# Altium PCB 3 Channel Buck Converter PCB.PcbDoc (part 1 of 2)
Units mm, origin at the board's own origin, x right, y up, seen from the top; angles counter-clockwise.
Board outline 60 x 50 mm, 2 copper layers (Top Layer, Bottom Layer); 65 components, 39 nets, 165 pads, 74 vias.
Unrouted connection lines stored in the file: 123.
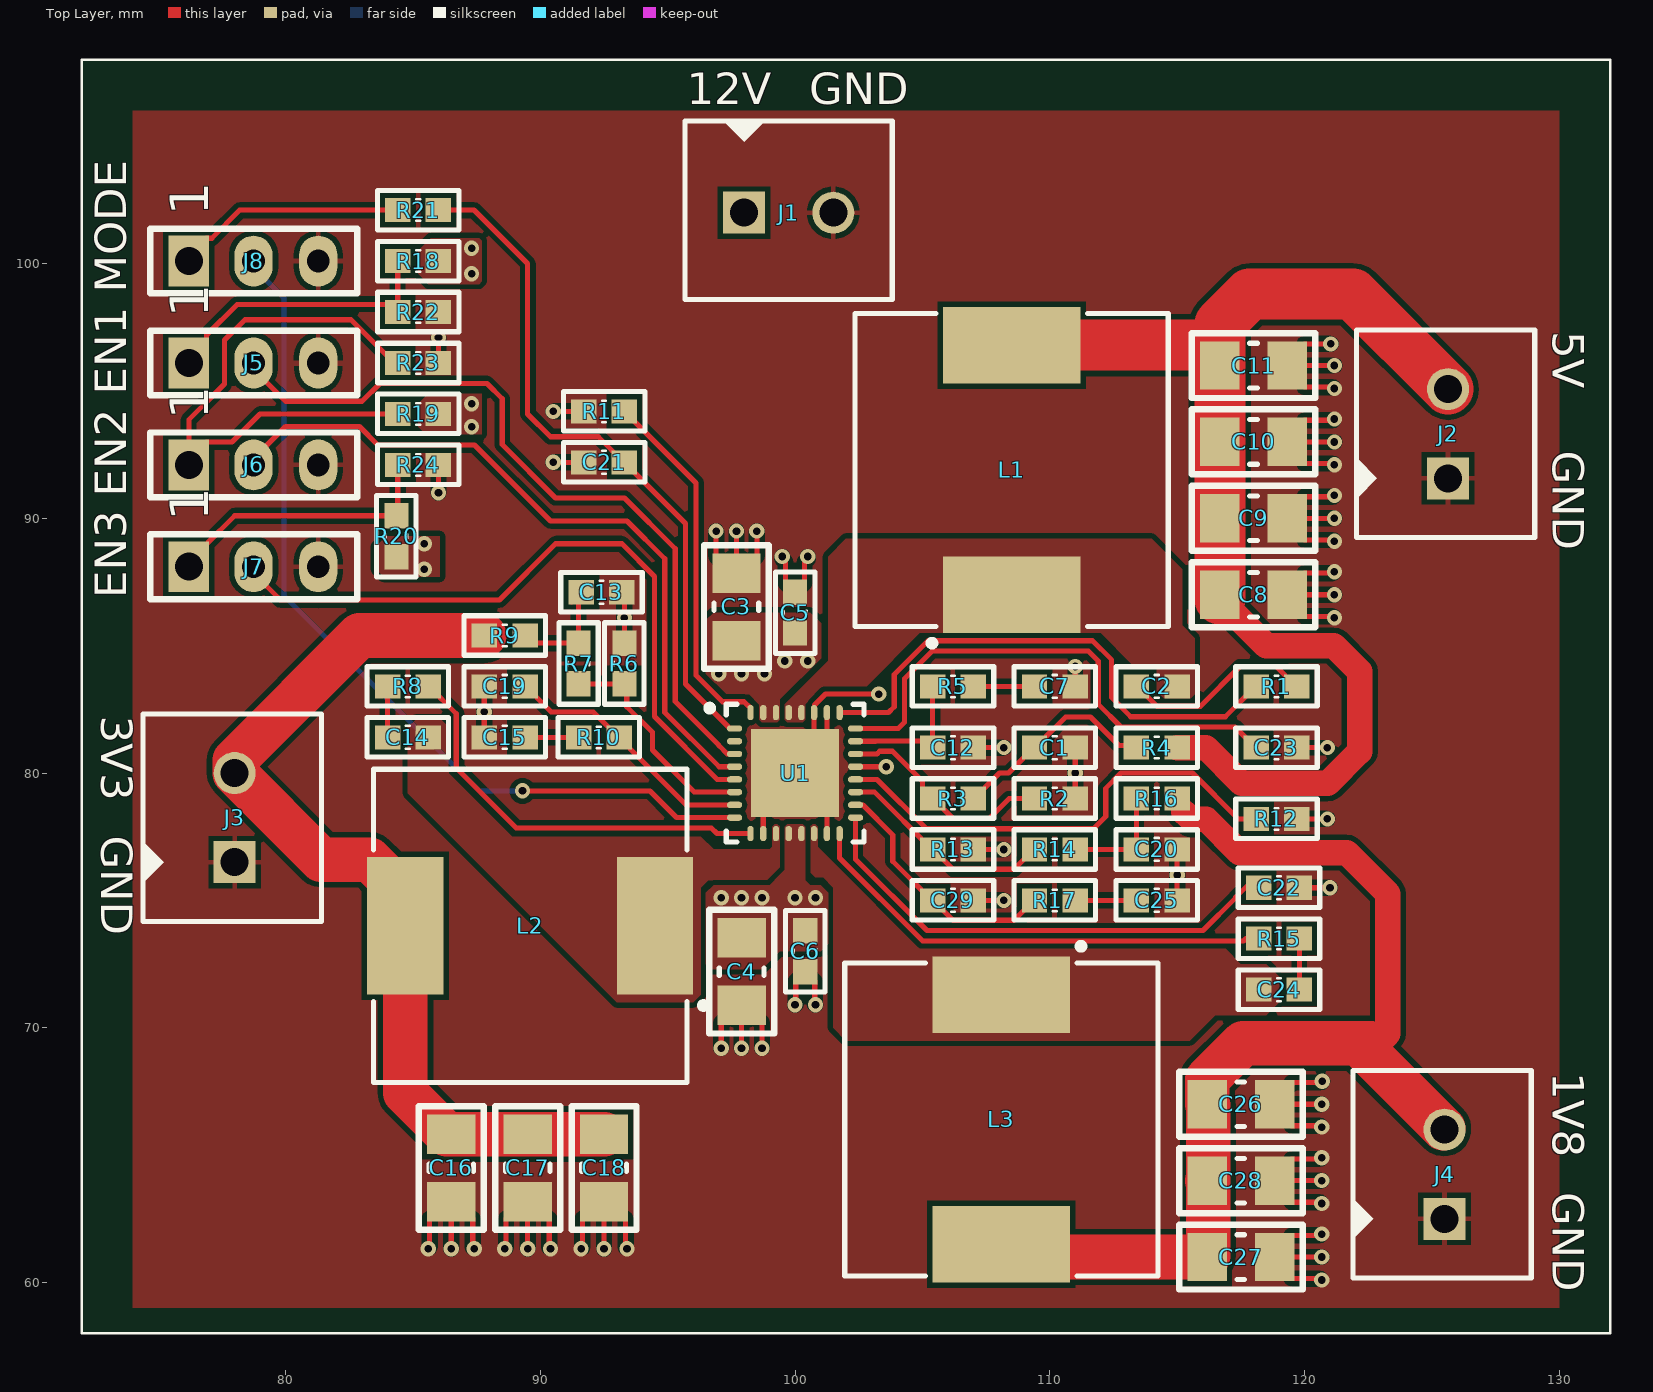
[diagram p0: Top Layer view]
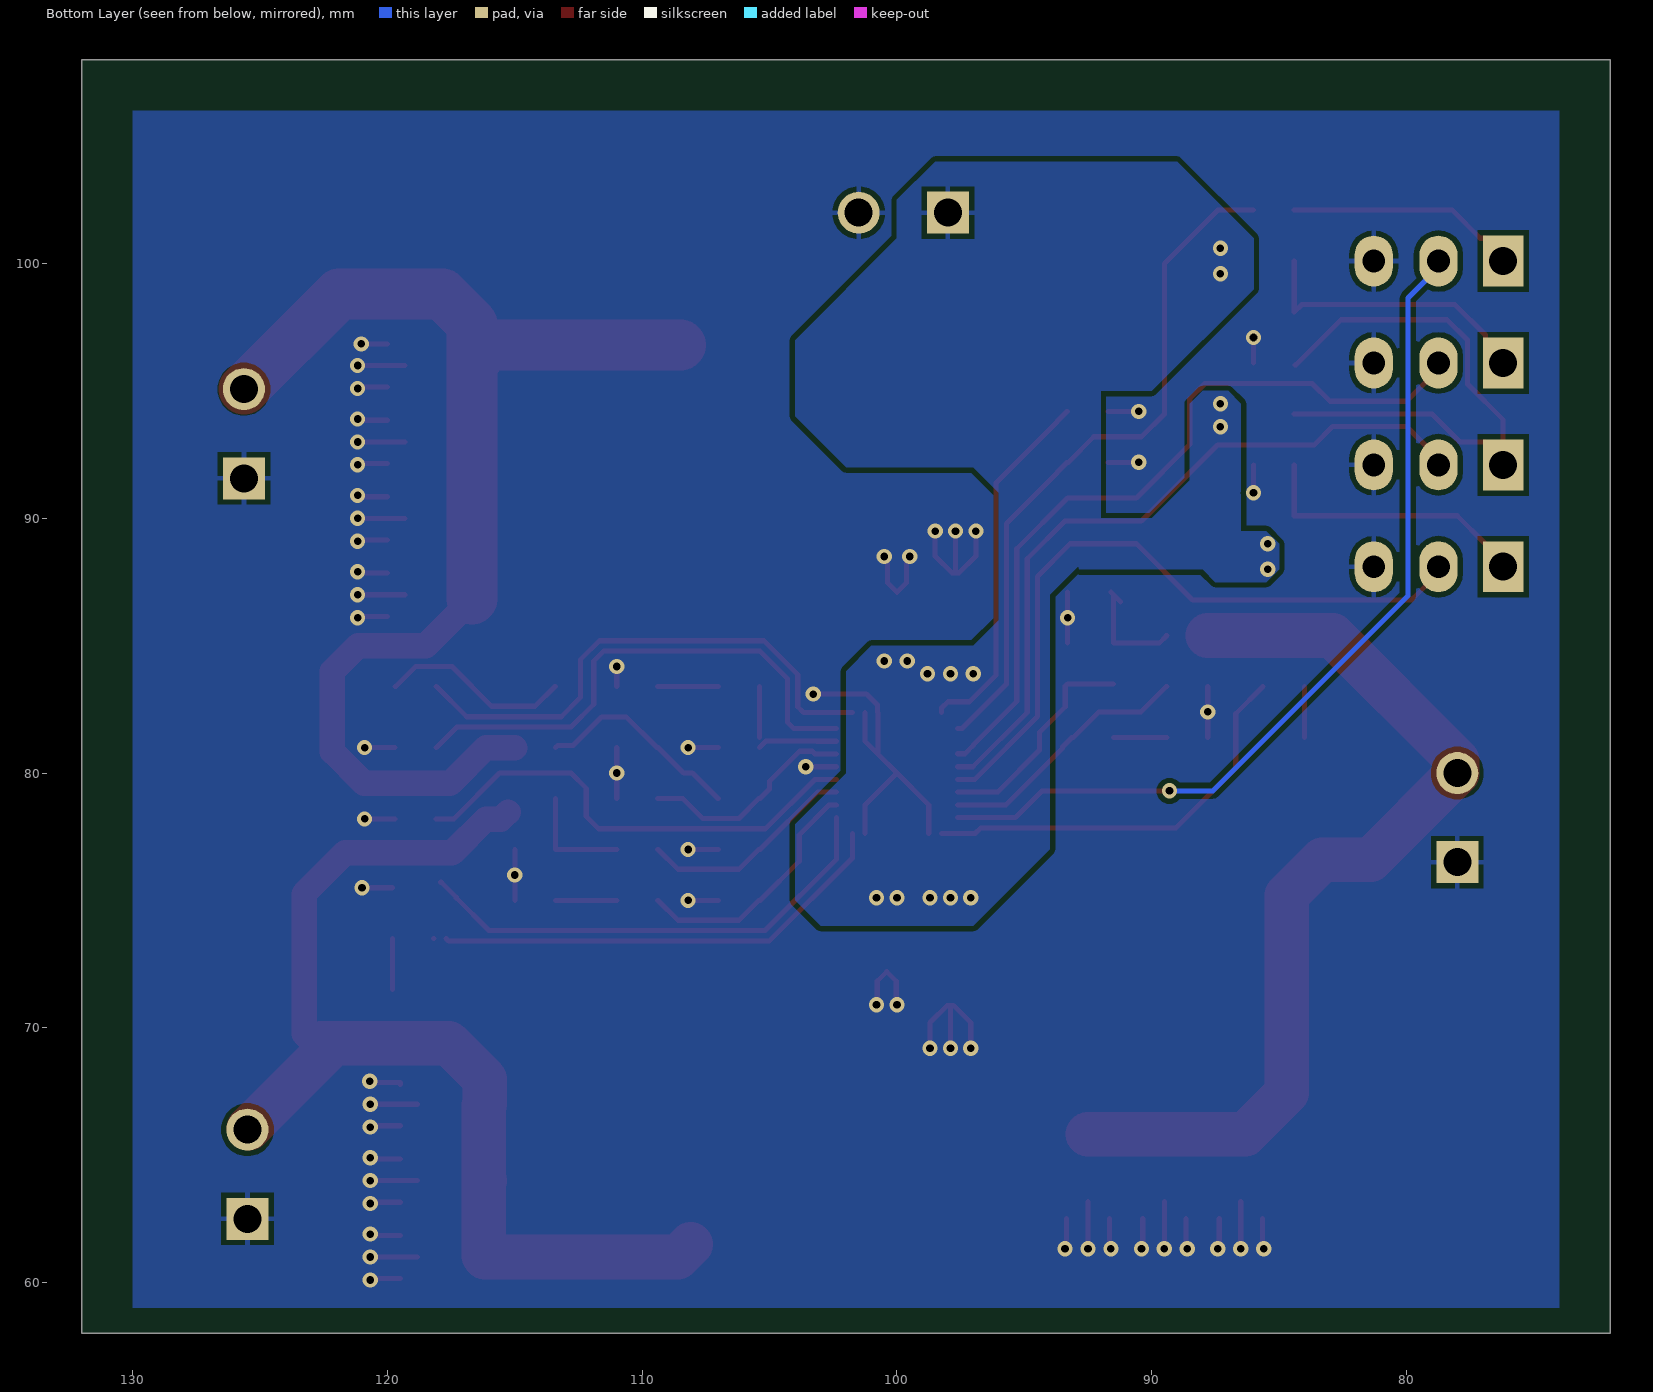
[diagram p1: Bottom Layer view, seen from below]
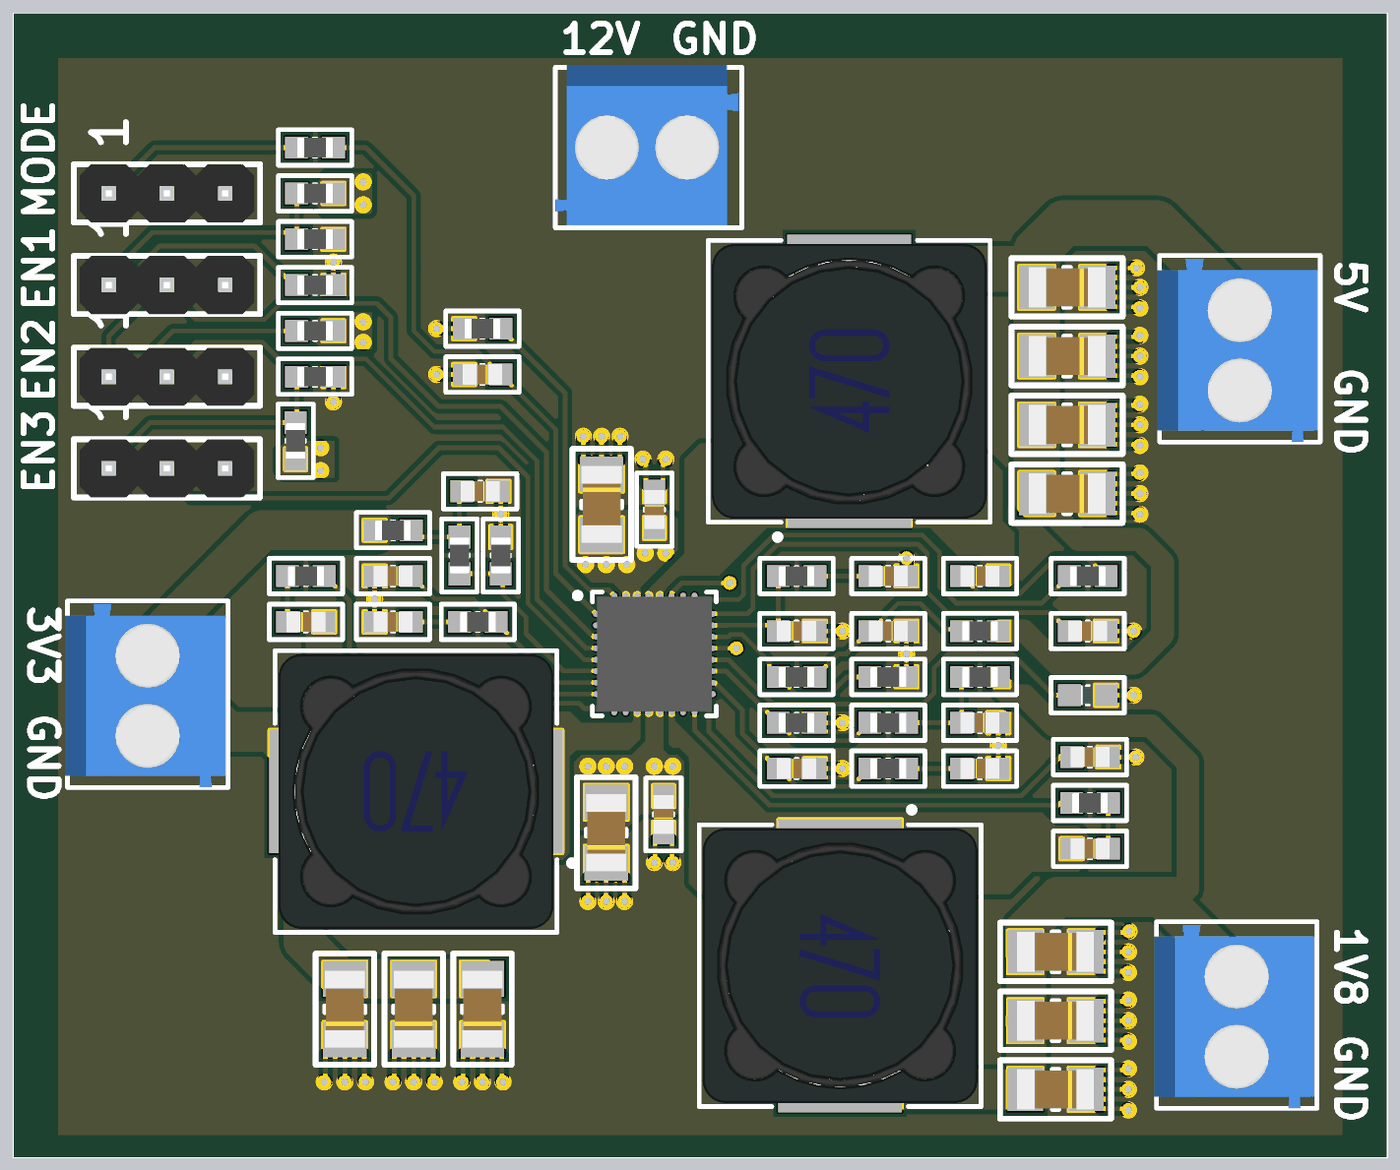
[diagram p2: 3D render of the assembled board from above, using the file's embedded part models]

## Layer stack, top to bottom
Top Solder: solder mask 0.0102, Solder Resist, Dk 3.5
Top Layer: signal copper 0.0356
Dielectric 1: dielectric 0.32, FR-4, Dk 4.8
Bottom Layer: signal copper 0.0356
Bottom Solder: solder mask 0.0102, Solder Resist, Dk 3.5

## Board outline
72,58 72,108 132,108 132,58

## Design rules (kind name [scope] priority, off if disabled: settings)
BoardOutlineClearance [All] p1: gap=0.2 ignorepadtopadclearanceinfootprint=FALSE
Clearance [All] p1: gap=0.203 ignorepadtopadclearanceinfootprint=FALSE except(0.25: Arc-Hole Track-Hole SMDPad-Hole THPad-Hole Via-Hole Fill-Hole Poly-Hole Region-Hole Text-Hole)
ComponentClearance [All] p1: gap=0.127 collisioncheckmode=3 verticalgap=0.127 showdistances=TRUE
DiffPairsRouting [All] p1: maxlimit=0.381 minlimit=0.203 mostfreqgap=0.203 toplayer_minwidth=0.203 toplayer_maxwidth=25.4 toplayer_prefwidth=0.203 bottomlayer_minwidth=0.203 bottomlayer_maxwidth=25.4 bottomlayer_prefwidth=0.203 maxuncoupledlength=12.7
Height [All] p1: minheight=0 maxheight=1816.048 prefheight=12.7
HoleSize [All] p1: absolutevalues=TRUE maxlimit=6.3 minlimit=0.3 maxpercent=80.000 minpercent=20.000
HoleToHoleClearance [All] p1: gap=0.25 allowstackedmicrovias=FALSE
MinimumAnnularRing [All] p1: minimumring=0.076
MinimumSolderMaskSliver [All] p1: minsoldermaskwidth=0
PlaneClearance [All] p1: clearance=0.203
PlaneConnect PlaneConnectPowerPads [InPadClass('PowerPads')] p1: planeconnectstyle=Direct reliefexpansion=0.508 reliefentries=4 reliefconductorwidth=0.254 reliefairgap=0.254
PlaneConnect [All] p2: planeconnectstyle=Direct reliefexpansion=0.3 reliefentries=4 reliefconductorwidth=0.203 reliefairgap=0.203
PolygonConnect PolygonConnectPowerPads [All vs (InPadClass('PowerPads'))] p1: connectstyle=Direct reliefconductorwidth=0.254 reliefentries=4 polygonreliefangle="90 Angle" airgapwidth=0.254
PolygonConnect [All] p2: thpad.connectstyle=Relief thpad.reliefconductorwidth=0.203 thpad.reliefentries=4 thpad.polygonreliefangle="90 Angle" thpad.airgapwidth=0.203 smdpad.connectstyle=Direct smdpad.reliefconductorwidth=0.203 smdpad.reliefentries=4 smdpad.polygonreliefangle="90 Angle" smdpad.airgapwidth=0.203 via.connectstyle=Direct via.reliefconductorwidth=0.127 via.reliefentries=4 via.polygonreliefangle="90 Angle" via.airgapwidth=0.127
RoutingVias [All] p1: holewidth=0.3 width=0.6 viastyle="Through Hole" minholewidth=0.3 minwidth=0.6 maxholewidth=0.6 maxwidth=6.6
SilkToSilkClearance [All] p1: silktosilkclearance=0
SilkToSolderMaskClearance [IsPad] p1: minsilkscreentomaskgap=0.127 clearancetoexposedcopper=TRUE
SolderMaskExpansion [All] p1: expansion=0.075 istentingtop=FALSE
Width [All] p1: maxlimit=25.4 minlimit=0.203 preferedwidth=0.203 minimp=50.000000 maximp=50.000000 favimp=50.000000
20 further rules are at their usual default settings.

## Components (designator, comment, footprint, x,y, rotation, side; value= is the part's Value field where it differs from the comment)
C1 "CAP_150pF_%1_0603_50V_NP0_CER" 0603_CAP 110.2,81 r180 top
C2 "CAP_0.47uF_%10_0603_25V_X7R_CER" 0603_CAP 114.2,83.4 r0 top
C3 "CAP_22uF_%10_1206_25V_X5R_CER" 1206_CAP 97.7,86.525 r270 top
C4 "CAP_22uF_%10_1206_25V_X5R_CER" 1206_CAP 97.9,72.2 r90 top
C5 "CAP_1uF_%10_0603_25V_X7R_CER" 0603_CAP 100,86.3 r270 top
C6 "CAP_1uF_%10_0603_25V_X7R_CER" 0603_CAP 100.4,73 r90 top
C7 "CAP_3300pF_0603_50V_X7R_CER" 0603_CAP 110.2,83.4 r0 top
C8 "CAP_22uF_%10_1206_25V_X5R_CER" 1206_CAP 118,87 r180 top
C9 "CAP_22uF_%10_1206_25V_X5R_CER" 1206_CAP 118,90 r180 top
C10 "CAP_22uF_%10_1206_25V_X5R_CER" 1206_CAP 118,93 r180 top
C11 "CAP_22uF_%10_1206_25V_X5R_CER" 1206_CAP 118,96 r180 top
C12 "CAP_3.3pF_±0.1pF_0603_50V_NP0_CER" 0603_CAP 106.2,81 r0 top
C13 "CAP_150pF_%1_0603_50V_NP0_CER" 0603_CAP 92.4,87.1 r180 top
C14 "CAP_0.47uF_%10_0603_25V_X7R_CER" 0603_CAP 84.8,81.4 r0 top
C15 "CAP_9100pF_%5_0603_50V_U2J_CER" 0603_CAP 88.6,81.4 r180 top
C16 "CAP_22uF_%10_1206_25V_X5R_CER" 1206_CAP 86.5,64.5 r90 top
C17 "CAP_22uF_%10_1206_25V_X5R_CER" 1206_CAP 89.5,64.5 r90 top
C18 "CAP_22uF_%10_1206_25V_X5R_CER" 1206_CAP 92.5,64.5 r90 top
C19 "CAP_6.8pF_±0.5p_0603_50V_C0G/NP0_CER" 0603_CAP 88.6,83.4 r180 top
C20 "CAP_150pF_%1_0603_50V_NP0_CER" 0603_CAP 114.2,77 r180 top
C21 "CAP_1uF_%10_0603_25V_X7R_CER" 0603_CAP 92.502,92.198 r180 top
C22 "CAP_10nF_%20_0603_50V_X7R_CER" 0603_CAP 119,75.5 r180 top
C23 "CAP_10nF_%20_0603_50V_X7R_CER" 0603_CAP 118.9,81 r180 top
C24 "CAP_0.47uF_%10_0603_25V_X7R_CER" 0603_CAP 119,71.5 r180 top
C25 "CAP_9100pF_%5_0603_50V_U2J_CER" 0603_CAP 114.2,75 r0 top
C26 "CAP_22uF_%10_1206_25V_X5R_CER" 1206_CAP 117.5,67 r180 top
C27 "CAP_22uF_%10_1206_25V_X5R_CER" 1206_CAP 117.5,61 r180 top
C28 "CAP_22uF_%10_1206_25V_X5R_CER" 1206_CAP 117.5,64 r180 top
C29 "CAP_6.8pF_±0.5p_0603_50V_C0G/NP0_CER" 0603_CAP 106.2,75 r0 top
J1 "CON_1X2_Terminal Block" "1x2_TERMINAL BLOCK" 98,102 r0 top
J2 "CON_1X2_Terminal Block" "1x2_TERMINAL BLOCK" 125.638,91.574 r90 top
J3 "CON_1X2_Terminal Block" "1x2_TERMINAL BLOCK" 78,76.5 r90 top
J4 "CON_1X2_Terminal Block" "1x2_TERMINAL BLOCK" 125.5,62.5 r90 top
J5 "CON_1X3_2.54mm_Male Header" DIP_1X3_HEADER_2.54_PITCH 76.2,96.1 r0 top
J6 "CON_1X3_2.54mm_Male Header" DIP_1X3_HEADER_2.54_PITCH 76.2,92.1 r0 top
J7 "CON_1X3_2.54mm_Male Header" DIP_1X3_HEADER_2.54_PITCH 76.2,88.1 r0 top
J8 "CON_1X3_2.54mm_Male Header" DIP_1X3_HEADER_2.54_PITCH 76.2,100.1 r0 top
L1 "IND_10uH_5A_26.5 mOHM_SMD" INDP120120X100N 108.5,91.9 r90 top
L2 "IND_22uH_3.2A_40 mOHM_SMD" INDP120120X100N 89.6,74 r180 top
L3 "IND_15uH_4.6A_36 mOHM_SMD" INDP120120X100N 108.1,66.4 r270 top
R1 "RES_0 OHM_JUMPER_0603_1/10W" 0603_RES 118.9,83.4 r180 top
R2 "RES_4.99K OHM_1%_0603_1/10W" 0603_RES 110.2,79 r180 top
R3 "RES_36.5K OHM_1%_0603_1/10W" 0603_RES 106.2,79 r0 top
R4 "RES_0 OHM_JUMPER_0603_1/10W" 0603_RES 114.2,81 r0 top
R5 "RES_24.9K OHM_1%_0603_1/10W" 0603_RES 106.2,83.4 r0 top
R6 "RES_4.99K OHM_1%_0603_1/10W" 0603_RES 93.3,84.3 r270 top
R7 "RES_22.6K OHM_1%_0603_1/10W" 0603_RES 91.5,84.3 r90 top
R8 "RES_0 OHM_JUMPER_0603_1/10W" 0603_RES 84.8,83.4 r0 top
R9 "RES_0 OHM_JUMPER_0603_1/10W" 0603_RES 88.6,85.4 r180 top
R10 "RES_15.4K OHM_1%_0603_1/10W" 0603_RES 92.3,81.4 r180 top
R11 "RES_0 OHM_JUMPER_0603_1/10W" 0603_RES 92.502,94.198 r0 top
R12 "RES_84.5K OHM_1%_0603_1/10W" 0603_RES 118.9,78.2 r180 top
R13 "RES_10K OHM_1%_0603_1/10W" 0603_RES 106.2,77 r180 top
R14 "RES_20K OHM _1%_0603_1/10W" 0603_RES 110.2,77 r0 top
R15 "RES_0 OHM_JUMPER_0603_1/10W" 0603_RES 119,73.5 r180 top
R16 "RES_0 OHM_JUMPER_0603_1/10W" 0603_RES 114.2,79 r0 top
R17 "RES_15.4K OHM_1%_0603_1/10W" 0603_RES 110.2,75 r0 top
R18 "RES_100K OHM_5%_0603_1/10W" 0603_RES 85.2,100.1 r0 top
R19 "RES_100K OHM_5%_0603_1/10W" 0603_RES 85.2,94.1 r0 top
R20 "RES_100K OHM_5%_0603_1/10W" 0603_RES 84.35,89.3 r270 top
R21 "RES_0 OHM_JUMPER_0603_1/10W" 0603_RES 85.2,102.1 r0 top
R22 "RES_33K OHM_5%_0603_1/10W" 0603_RES 85.2,98.1 r180 top
R23 "RES_33K OHM_5%_0603_1/10W" 0603_RES 85.2,96.1 r180 top
R24 "RES_33K OHM_5%_0603_1/10W" 0603_RES 85.2,92.1 r180 top
U1 "PMIC_TPS65265" QFN50P500X500X100_HS-33N 100,80 r0 top

## Footprints (in the part's own frame and the unit in brackets; to place one, negate y for a bottom-side part, rotate by r counter-clockwise, add the part's x,y. Pads: shape width x height; smd on the part's side, far side on the other; paste and mask are expansions set on the pad)
"1x2_TERMINAL BLOCK" [mm]
  rect 1.65x1.65 hole 1.1: 1(0,0)
  round 1.65 hole 1.1: 2(3.5,0)
  silkscreen extent -2.32,-3.4 5.82,3.6, body extent -2.32,-3.3 5.68,3.7, height 8.41
0603_CAP [mm]
  rect 1x0.95 smd: 1(-0.8,0) 2(0.8,0)
  silkscreen extent -1.6,-0.77 1.6,0.77, body extent -0.85,-0.44 0.85,0.44, height 0.89
0603_RES [mm]
  rect 1x0.95 smd: 1(-0.8,0) 2(0.8,0)
  silkscreen extent -1.6,-0.77 1.6,0.77, body extent -0.77,-0.43 0.77,0.43, height 0.49
1206_CAP [mm]
  rect 1.55x1.9 smd: 1(-1.325,0) 2(1.325,0)
  silkscreen extent -2.42,-1.28 2.42,1.28, body extent -1.68,-0.88 1.68,0.88, height 1.24
DIP_1X3_HEADER_2.54_PITCH [mm]
  rect 1.6x2 hole 1.1: 1(0,0)
  oval 1.5x2 hole 0.9: 2(2.54,0) 3(5.08,0)
  silkscreen extent -1.52,-1.27 6.6,1.27, body extent -1.27,-1.27 6.35,1.27, height 8.38
INDP120120X100N [mm] "Precision Wire Wound Inductor, 2-Leads, Body 12,00x12,00mm, IPC Medium Density"
  rect 3x5.4 smd: 1(-4.9,0) 2(4.9,0)
  silkscreen extent -6.92,-6.15 6.15,6.15, body extent -6,-6 6,6, height 7.42
QFN50P500X500X100_HS-33N [mm] "QFN, 32-Leads, Body 5,00x5,00mm, Pitch 0,50mm, Thermal Pad 3,45x3,45mm, IPC Medium Density"
  oval 0.6x0.25 smd: 1(-2.375,1.75) 2(-2.375,1.25) 3(-2.375,0.75) 4(-2.375,0.25) 5(-2.375,-0.25) 6(-2.375,-0.75) 7(-2.375,-1.25) 8(-2.375,-1.75) 17(2.375,-1.75) 18(2.375,-1.25) 19(2.375,-0.75) 20(2.375,-0.25) 21(2.375,0.25) 22(2.375,0.75) 23(2.375,1.25) 24(2.375,1.75)
  oval 0.25x0.6 smd: 9(-1.75,-2.375) 10(-1.25,-2.375) 11(-0.75,-2.375) 12(-0.25,-2.375) 13(0.25,-2.375) 14(0.75,-2.375) 15(1.25,-2.375) 16(1.75,-2.375) 25(1.75,2.375) 26(1.25,2.375) 27(0.75,2.375) 28(0.25,2.375) 29(-0.25,2.375) 30(-0.75,2.375) 31(-1.25,2.375) 32(-1.75,2.375)
  rect 3.45x3.45 smd: 33(0,0)
  silkscreen extent -3.47,-2.7 2.7,2.7, body extent -2.5,-2.5 2.5,2.5, height 1

## Part data
C1 C13 C20: "0603 150 pF 50 V ±1 % Tolerance C0G/NP0 SMT Multilayer Ceramic Capacitor", Capacitance=150pF, Case Code (Metric)=1608, Case Code (Imperial)=0603, Dielectric=C0G, Manufacturer="Kyocera AVX", Manufacturer Part Number=06035A151FAT2A, Max Operating Temperature=125°C, Min Operating Temperature=-55°C, Package Quantity=8000, Supplier Part Number 1=478-10291-1-ND, Temperature Coefficient=0ppm/°C, Tolerance=1%, Voltage Rating=50V, Case/Package=0603, Category="Ceramic Capacitors", ComponentLink1Description=https://datasheet.ciiva.com/11524/ccog-11524364.pdf?src-supplier=Avnet, ComponentLink1URL=https://datasheet.ciiva.com/11524/ccog-11524364.pdf?src-supplier=Avnet, ComponentLink2Description=https://datasheet.ciiva.com/16300/ccog-16300425.pdf?src-supplier=Future+Electronics, ComponentLink2URL=https://datasheet.ciiva.com/16300/ccog-16300425.pdf?src-supplier=Future+Electronics, ComponentLink3Description=https://datasheet.ciiva.com/209/ccog-209668.pdf?src-supplier=Digi-Key, ComponentLink3URL=https://datasheet.ciiva.com/209/ccog-209668.pdf?src-supplier=Digi-Key, ComponentLink4Description=https://datasheet.ciiva.com/22676/1796416-22676952.pdf?src-supplier=Element14, ComponentLink4URL=https://datasheet.ciiva.com/22676/1796416-22676952.pdf?src-supplier=Element14, ComponentLink5Description=https://datasheet.ciiva.com/28533/1796416-28533342.pdf?src-supplier=Element14, ComponentLink5URL=https://datasheet.ciiva.com/28533/1796416-28533342.pdf?src-supplier=Element14, ComponentLink6Description=https://datasheet.ciiva.com/5416/ccog-243403-5416088.pdf?src-supplier=Mouser, ComponentLink6URL=https://datasheet.ciiva.com/5416/ccog-243403-5416088.pdf?src-supplier=Mouser, Contact Plating=Tin,Matte, Depth=0.81mm, Lead Free="Lead Free", Length=1.6mm, Mount="Surface Mount", Packaging="Tape and Reel", Pricing 1="1=0,22000, 10=0,14900, 50=0,08920, 100=0,07530, 500=0,05154, 1000=0,04559 (USD)", Radiation Hardening=No, REACH SVHC="No SVHC", RoHS=Yes, RoHS Compliant=Yes, Stock 1=18402, Supplier 1=Digi-Key, Termination=SMD/SMT, Thickness=0.035inch, Voltage Rating (DC)=50V, Width=0.032inch
C2 C14 C24: "470nF Multilayer Ceramic Capacitor MLCC25 V; X7R Dielectric 0603 Surface Mount", Capacitance=470nF, Case Code (Metric)=1608, Case Code (Imperial)=0603, Dielectric=X7R, Manufacturer="Wurth Electronics", Manufacturer Part Number=885012206075, Max Operating Temperature=125°C, Min Operating Temperature=-55°C, Supplier Part Number 1=732-7993-1-ND, Tolerance=10%, Voltage Rating=25V, Case/Package=0603, Category="Ceramic Capacitors", ComponentLink1Description=http://www.farnell.com/datasheets/1958476.pdf?src-supplier=Farnell, ComponentLink1URL=http://www.farnell.com/datasheets/1958476.pdf?src-supplier=Farnell, ComponentLink2Description=https://katalog.we-online.de/pbs/datasheet/885012206075.pdf?src-supplier=Digi-Key, ComponentLink2URL=https://katalog.we-online.de/pbs/datasheet/885012206075.pdf?src-supplier=Digi-Key, ComponentLink3Description=http://www.farnell.com/datasheets/1958476.pdf?src-supplier=Newark, ComponentLink3URL=http://www.farnell.com/datasheets/1958476.pdf?src-supplier=Newark, ComponentLink4Description=http://www.farnell.com/datasheets/1958476.pdf?src-supplier=Element14, ComponentLink4URL=http://www.farnell.com/datasheets/1958476.pdf?src-supplier=Element14, Length=0.063inch, Mount="Surface Mount", Packaging="Cut Tape", Pricing 1="1=0,10000, 10=0,09100, 100=0,08200, 500=0,07200 (USD)", REACH SVHC=Unknown, RoHS=Yes, RoHS Compliant=Yes, Stock 1=71771, Supplier 1=Digi-Key, Thickness=0.037inch, Voltage Rating (DC)=25V, Width=0.031inch
C3 C4 C8 C9 C10 C11 C16 C17 C18 C26 C27 C28: "1206 22 uF 25 V ±10% Tolerance X5R Multilayer Ceramic Chip Capacitor", Capacitance=22uF, Case Code (Metric)=3216, Case Code (Imperial)=1206, Dielectric=X5R, Manufacturer=Yageo, Manufacturer Part Number=CC1206KKX5R8BB226, Max Operating Temperature=85°C, Min Operating Temperature=-55°C, Package Quantity=2000, Resistor Type=Ceramic, Supplier Part Number 1=311-3448-1-ND, Tolerance=10%, Voltage Rating=25V, Case/Package=1206, Category="Ceramic Capacitors", ComponentLink1Description=http://www.mouser.com/ds/2/447/Yageo_UPY-GP_NP0_16V-to-50V_9-358835.pdf?src-supplier=Mouser, ComponentLink1URL=http://www.mouser.com/ds/2/447/Yageo_UPY-GP_NP0_16V-to-50V_9-358835.pdf?src-supplier=Mouser, ComponentLink2Description=http://www.yageo.com/documents/recent/UPY-GPHC_X5R_4V-to-50V_25.pdf?src-supplier=Digi-Key, ComponentLink2URL=http://www.yageo.com/documents/recent/UPY-GPHC_X5R_4V-to-50V_25.pdf?src-supplier=Digi-Key, ComponentLink3Description=http://www.yageo.com/documents/recent/UPY-GPHC_X5R_4V-to-50V_23.pdf?src-supplier=Digi-Key, ComponentLink3URL=http://www.yageo.com/documents/recent/UPY-GPHC_X5R_4V-to-50V_23.pdf?src-supplier=Digi-Key, Halogen Free="Halogen Free", Lead Free="Lead Free", Length=0.126inch, Mount="Surface Mount", Packaging="Tape and Reel", Pricing 1="1=0,70000, 10=0,49700, 50=0,37600, 100=0,32740, 500=0,24256, 1000=0,20617 (USD)", RoHS=Yes, RoHS Compliant=Yes, Stock 1=447, Supplier 1=Digi-Key, Termination=SMD/SMT, Thickness=0.057inch, Voltage Rating (DC)=25V, Weight=0.000571oz, Width=0.063inch
C5 C6 C21: "TAPE DUCT CLOTH GRAY 3/4X 50YDS", Capacitance=1uF, Manufacturer=Yageo, Manufacturer Part Number=CC0603KPX7R8BB105, Supplier Part Number 1=13-CC0603KPX7R8BB105CT-ND, Category="Ceramic Capacitors", Pricing 1="1=0,26000, 10=0,17700, 50=0,11780, 100=0,10020, 500=0,07070, 1000=0,06186, 2500=0,05892, 5000=0,05450 (USD)", Pricing 2="1=0,26000, 10=0,17700, 50=0,11780, 100=0,10020, 500=0,07070, 1000=0,06186, 2500=0,05892, 5000=0,05450 (USD)", RoHS=Yes, Stock 1=56889, Stock 2=56889, Supplier 1=Digi-Key, Supplier 2=Digi-Key, Supplier Part Number 2=13-CC0603KPX7R8BB105DKR-ND
C7: "3300 pF ±10% 50V Ceramic Capacitor X7R 0603 (1608 Metric)", Capacitance="3300 pF", Case/Package=0603, Dielectric=X7R, Manufacturer=Meritek, Manufacturer Part Number=MA0603XR332K500, Resistor Type=Ceramic, Tolerance=±10%, Voltage Rating=50V, Termination=SMD/SMT
C12: "0603 3.3 pF 50 V ±0.1 pF Tolerance C0G/NP0 SMT Multilayer Ceramic Capacitor", Capacitance=3.3pF, Case Code (Metric)=1608, Case Code (Imperial)=0603, Dielectric=C0G, Manufacturer="Kyocera AVX", Manufacturer Part Number=06035A3R3BAT2A, Max Operating Temperature=125°C, Min Operating Temperature=-55°C, Package Quantity=1, Supplier Part Number 1=478-7919-1-ND, Voltage Rating=50V, Case/Package=0603, Category="Ceramic Capacitors", ComponentLink1Description=https://datasheet.ciiva.com/7614/ccog-7614679.pdf?src-supplier=Digi-Key, ComponentLink1URL=https://datasheet.ciiva.com/7614/ccog-7614679.pdf?src-supplier=Digi-Key, ComponentLink2Description=https://datasheet.ciiva.com/14891/ccog-14891031.pdf?src-supplier=Digi-Key, ComponentLink2URL=https://datasheet.ciiva.com/14891/ccog-14891031.pdf?src-supplier=Digi-Key, ComponentLink3Description=https://datasheet.ciiva.com/14891/ccog-14891032.pdf?src-supplier=Digi-Key, ComponentLink3URL=https://datasheet.ciiva.com/14891/ccog-14891032.pdf?src-supplier=Digi-Key, ComponentLink4Description=https://datasheet.ciiva.com/17493/ccog-17493705.pdf?src-supplier=Avnet+Europe, ComponentLink4URL=https://datasheet.ciiva.com/17493/ccog-17493705.pdf?src-supplier=Avnet+Europe, ComponentLink5Description=https://datasheet.ciiva.com/214/ccog-214122.pdf?src-supplier=Digi-Key, ComponentLink5URL=https://datasheet.ciiva.com/214/ccog-214122.pdf?src-supplier=Digi-Key, ComponentLink6Description=https://datasheet.ciiva.com/11552/ccog-11552874.pdf?src-supplier=Avnet, ComponentLink6URL=https://datasheet.ciiva.com/11552/ccog-11552874.pdf?src-supplier=Avnet, Construction=Flat, Depth=0.81mm, Dissipation Factor=10%, Height=0.86mm, Lead Free="Lead Free", Length=1.6mm, Mount="Surface Mount", Packaging="Tape and Reel", Radiation Hardening=No, RoHS=Yes, RoHS Compliant=Yes, Series=-, Supplier 1=Digi-Key, Termination=SMD/SMT, Thickness=0.035inch, Voltage Rating (DC)=50V, Width=0.81mm
C15 C25: "Cap Ceramic 0.0091uF 50V U2J 5% Pad SMD 0603 Flexible Termination 125C T/R", Capacitance=9.1nF, Case Code (Metric)=1608, Case Code (Imperial)=0603, Manufacturer=KEMET, Manufacturer Part Number=C0603X912J5JACTU, Max Operating Temperature=125°C, Min Operating Temperature=-55°C, Supplier Part Number 1=399-13417-1-ND, Tolerance=5%, Voltage Rating=50V, Case/Package=0603, Category="Ceramic Capacitors", ComponentLink1Description=http://www.farnell.com/datasheets/2157976.pdf?src-supplier=Element14, ComponentLink1URL=http://www.farnell.com/datasheets/2157976.pdf?src-supplier=Element14, ComponentLink2Description=http://www.kemet.com/docfinder?Partnumber=C0603X912J5JAC7867&src-supplier=Digi-Key, ComponentLink2URL=http://www.kemet.com/docfinder?Partnumber=C0603X912J5JAC7867&src-supplier=Digi-Key, ComponentLink3Description=https://api.kemet.com/component-edge/download/datasheet/C0603X912J5JAC7867.pdf?src-supplier=Digi-Key, ComponentLink3URL=https://api.kemet.com/component-edge/download/datasheet/C0603X912J5JAC7867.pdf?src-supplier=Digi-Key, Features="Soft Termination", Length=0.063inch, Mount="Surface Mount", Packaging="Tape and Reel", Pricing 1="1=0,47000, 10=0,33500, 50=0,25300, 100=0,22040, 500=0,16324, 1000=0,13875 (USD)", RoHS=Yes, RoHS Compliant=Yes, Stock 1=12624, Supplier 1=Digi-Key, Thickness=0.034inch, Width=0.031inch
C19 C29: "0603 6.8 pF 50 V ±0.5 pF Tolerance C0G/NP0 SMT Multilayer Ceramic Capacitor", Capacitance=6.8pF, Case Code (Metric)=1608, Case Code (Imperial)=0603, Dielectric=C0G, Manufacturer="Kyocera AVX", Manufacturer Part Number=06035A6R8DAT2A, Max Operating Temperature=125°C, Min Operating Temperature=-55°C, Package Quantity=4000, Supplier Part Number 1=478-10335-1-ND, Voltage Rating=50V, Case/Package=0603, Category="Ceramic Capacitors", ComponentLink1Description=https://datasheet.ciiva.com/16327/ccog-16327085.pdf?src-supplier=Future+Electronics, ComponentLink1URL=https://datasheet.ciiva.com/16327/ccog-16327085.pdf?src-supplier=Future+Electronics, ComponentLink2Description=https://datasheet.ciiva.com/204/ccog-204489.pdf?src-supplier=Digi-Key, ComponentLink2URL=https://datasheet.ciiva.com/204/ccog-204489.pdf?src-supplier=Digi-Key, Depth=0.81mm, Lead Free="Lead Free", Length=1.6mm, Mount="Surface Mount", Packaging="Tape and Reel", Pricing 1="1=0,10000, 10=0,05600, 50=0,03040, 100=0,02480, 500=0,01772, 1000=0,01392 (USD)", Radiation Hardening=No, RoHS=Yes, RoHS Compliant=Yes, Stock 1=84698, Supplier 1=Digi-Key, Termination=SMD/SMT, Thickness=0.035inch, Voltage Rating (DC)=50V, Width=0.81mm
C22 C23: "Cap Ceramic 0.01uF 50V X7R 20% SMD 0603 125°C Paper T/R", Capacitance=10nF, Case Code (Metric)=1608, Case Code (Imperial)=0603, Dielectric=X7R, Dielectric Material=Ceramic, Manufacturer=KEMET, Manufacturer Part Number=C0603C103M5RAC7411, Max Operating Temperature=125°C, Min Operating Temperature=-55°C, Package Quantity=50000, Supplier Part Number 1=399-C0603C103M5RAC7411CT-ND, Tolerance=20%, Voltage Rating=50V, Case/Package=0603, Category="Ceramic Capacitors", ComponentLink1Description=http://www.mouser.com/ds/2/212/KEM_C1002_X7R_SMD-1102033.pdf?src-supplier=Mouser, ComponentLink1URL=http://www.mouser.com/ds/2/212/KEM_C1002_X7R_SMD-1102033.pdf?src-supplier=Mouser, ComponentLink2Description=http://capacitoredge.kemet.com/capedge2/DataSheet?pn=C0603C103M5RAC7411&src-supplier=Avnet, ComponentLink2URL=http://capacitoredge.kemet.com/capedge2/DataSheet?pn=C0603C103M5RAC7411&src-supplier=Avnet, Construction=Flat, Contact Plating=Tin,Matte, Depth=0.8mm, Height=0.8mm, Lead Pitch=0.7mm, Length=1.6mm, Mount="Surface Mount", Packaging="Tape and Reel", Pricing 1="1=0,10000, 10=0,03000, 50=0,01640, 100=0,01350, 500=0,00962, 1000=0,00756, 2500=0,00688, 5000=0,00632 (USD)", Radiation Hardening=No, RoHS=Yes, RoHS Compliant=Yes, Series=C0603C, Stock 1=173355, Supplier 1=Digi-Key, Termination=SMD/SMT, Voltage Rating (DC)=50V
J1 J2 J3 J4: "Series 1377 - 5.00 mm Horizontal Entry with Pressure Clamp WR-TBL, 2 pin", Color=Green, Current=16A, Manufacturer="Wurth Electronics", Manufacturer Part Number=691137710002, Max Operating Temperature=120°C, Min Operating Temperature=-30°C, Supplier Part Number 1=732-10955-ND, Voltage=300V, Category="Terminal Blocks", ComponentLink1Description=https://katalog.we-online.de/em/datasheet/691137710002.pdf?src-supplier=Digi-Key, ComponentLink1URL=https://katalog.we-online.de/em/datasheet/691137710002.pdf?src-supplier=Digi-Key, Housing Material=PC, Mount="Through Hole", Number of Levels=1, Number of Positions Per Level=2, Packaging=Bulk, Plating="Copper Alloy", Pricing 1="1=0,39000, 10=0,35200, 50=0,31100, 100=0,27900, 500=0,26900 (USD)", RoHS=No, Stock 1=10587, Supplier 1=Digi-Key, Termination=Screw, Wire Gauge (Max)=30AWG, Wire Gauge (Min)=12AWG
J5 J6 J7 J8: "Conn Header Vert 3POS 2.54MM", Color=Black, Manufacturer=Sullins, Manufacturer Part Number=PREC003SAAN-RC, Package Quantity=1, Supplier Part Number 1=S1012EC-03-ND, Category=Connectors, ComponentLink1Description=https://datasheet.ciiva.com/740/zrzczzzszzn-rc-st-11635-b-740842.pdf?src-supplier=Digi-Key, ComponentLink1URL=https://datasheet.ciiva.com/740/zrzczzzszzn-rc-st-11635-b-740842.pdf?src-supplier=Digi-Key, Connector Type="Male Pin", Contact Mating Length=0.23inch, Contact Plating=Tin, Contact Type="Male Pin", Mount="Through Hole", Number of Positions=3, Number of Rows=1, Packaging=Bulk, Pitch=0.1inch, Pricing 1="1=0,09000, 10=0,08400, 25=0,06240, 50=0,05340, 100=0,05170, 250=0,04456, 500=0,04276 (USD)", RoHS=Yes, RoHS Compliant=Yes, Series=-, Stock 1=15048, Supplier 1=Digi-Key, Termination=Solder
L1: "Fixed Ind 10UH 5A 26.5 Mohm SMD", Case/Package=Nonstandard, Current Rating=5A, DC Resistance (DCR)=26.5mR, Manufacturer="Wurth Electronics", Manufacturer Part Number=784771100, Max Operating Temperature=125°C, Min Operating Temperature=-40°C, Ratings=AEC-Q200, Resistor Type=Wirewound, Saturation Current=5.25A, Self Resonant Frequency=22.3MHz, Supplier Part Number 1=710-784771100, Test Frequency=100kHz, Tolerance=20%, Inductance=10uH, Category="Fixed Inductors", ComponentLink1Description=https://media.digikey.com/pdf/Data%20Sheets/Wurth%20Electronics%20PDFs/Q+_Products_Flyer.pdf?src-supplier=Digi-Key, ComponentLink1URL=https://media.digikey.com/pdf/Data%20Sheets/Wurth%20Electronics%20PDFs/Q+_Products_Flyer.pdf?src-supplier=Digi-Key, Core Material=Ferrite, Height - Seated (Max)=0.248inch, Length=0.472inch, Mount="Surface Mount", Packaging="Tape and Reel", Pricing 1="1=2,37000, 10=2,11000, 50=1,96000, 100=1,89000, 1000=1,65000, 10000=1,65000 (USD)", RoHS=Yes, RoHS Compliant=No, Shielding=Shielded, Stock 1=177, Supplier 1=Mouser, Width=0.472inch
L2: "Fixed Ind 22UH 3.2A 40 Mohm SMD", Case/Package=Nonstandard, Current Rating=3.2A, DC Resistance (DCR)=40mR, Manufacturer="Wurth Electronics", Manufacturer Part Number=784771220, Max Operating Temperature=125°C, Min Operating Temperature=-40°C, Ratings=AEC-Q200, Resistor Type=Wirewound, Saturation Current=3.5A, Self Resonant Frequency=14.9MHz, Supplier Part Number 1=732-6773-1-ND, Test Frequency=100kHz, Tolerance=20%, Inductance=22uH, Category="Fixed Inductors", ComponentLink1Description=https://media.digikey.com/pdf/Data%20Sheets/Wurth%20Electronics%20PDFs/Q+_Products_Flyer.pdf?src-supplier=Digi-Key, ComponentLink1URL=https://media.digikey.com/pdf/Data%20Sheets/Wurth%20Electronics%20PDFs/Q+_Products_Flyer.pdf?src-supplier=Digi-Key, Core Material=Ferrite, Height - Seated (Max)=0.248inch, Length=0.472inch, Mount="Surface Mount", Packaging="Cut Tape", Pricing 1="1=2,37000, 10=2,10900, 50=1,95900, 100=1,88400, 250=1,80800 (USD)", RoHS=Yes, RoHS Compliant=No, Shielding=Shielded, Stock 1=156, Supplier 1=Digi-Key, Width=0.472inch
L3: "Inductor, Aec-Q200, 15Uh, Shld, 4.6A Rohs Compliant: Yes", Manufacturer="Wurth Electronics", Manufacturer Part Number=7847709150, Supplier Part Number 1=732-11747-1-ND, Inductance=15uH, Category="Fixed Inductors", Pricing 1="1=2,82000, 10=2,78200, 50=2,59700, 100=2,41200 (USD)", RoHS=No, RoHS Compliant=No, Stock 1=908, Supplier 1=Digi-Key
R1 R4 R8 R9 R11 R15 R16 R21: "CRCW Thick Film Commodity Chip Resistor Jumper 0603 Size 0 Ohm 0.1 W 2-Pin SMD Paper T/R", Case Code (Metric)=1608, Case Code (Imperial)=0603, Manufacturer=Vishay, Manufacturer Part Number=CRCW06030000Z0EBC, Max Operating Temperature=155°C, Max Power Dissipation=100mW, Min Operating Temperature=-55°C, Resistance=0mR, Resistor Type="Thick Film", Supplier Part Number 1=541-4013-2-ND, Case/Package=0603, Category="Chip SMD Resistors", ComponentLink1Description=http://www.vishay.com/docs/28773/crcwce3.pdf?src-supplier=Digi-Key, ComponentLink1URL=http://www.vishay.com/docs/28773/crcwce3.pdf?src-supplier=Digi-Key, Number of Terminations=2, Packaging="Cut Tape", Pricing 1="10000=0,00332 (USD)", RoHS=Yes, RoHS Compliant=Yes, Stock 1=708702, Supplier 1=Digi-Key
R2 R6: "Res Thick Film 0603 4.99K Ohm 1% 1/10W ±100ppm/°C Molded SMD SMD Paper T/R", Case Code (Metric)=1608, Case Code (Imperial)=0603, Manufacturer="Vishay Dale", Manufacturer Part Number=CRCW06034K99FKEB, Max Operating Temperature=155°C, Max Power Dissipation=100mW, Min Operating Temperature=-55°C, Package Quantity=10000, Resistance=4.99kR, Resistance Tolerance=1%, Resistor Type="Thick Film", Supplier Part Number 1=541-CRCW06034K99FKEBCT-ND, Temperature Coefficient=100ppm/°C, Voltage Rating=75V, Case/Package=0603, Category="Chip SMD Resistors", ComponentLink1Description=https://datasheet.ciiva.com/5548/dcrcwe3-109170-5548185.pdf?src-supplier=Mouser, ComponentLink1URL=https://datasheet.ciiva.com/5548/dcrcwe3-109170-5548185.pdf?src-supplier=Mouser, ComponentLink2Description=https://datasheet.ciiva.com/9069/dcrcwe3-9069243.pdf?src-supplier=Avnet, ComponentLink2URL=https://datasheet.ciiva.com/9069/dcrcwe3-9069243.pdf?src-supplier=Avnet, Construction=Rectangular, Contact Plating=Tin, Depth=0.85mm, Features="Automotive AEC-Q200", Height=0.02inch, Lead Free="Lead Free", Length=1.55mm, Military Standard=Not, Mount="Surface Mount", Number of Terminations=2, Packaging="Tape and Reel", Power Rating=100mW, Pricing 1="1=0,10000, 10=0,03800, 100=0,01560, 1000=0,00701, 2500=0,00608, 5000=0,00503 (USD)", REACH SVHC=Unknown, RoHS=Yes, RoHS Compliant=Yes, Series=CRCW, Size Code=0603, Supplier 1=Digi-Key, Tolerance=1%, Voltage Rating (DC)=75V, Weight=7.1E-05oz, Width=0.85mm
R3: "Res Thick Film 0603 36.5K Ohm 1% 0.1W(1/10W) ±100ppm/C Molded SMD Automotive Paper T/R", Case Code (Metric)=1608, Case Code (Imperial)=0603, Manufacturer=Vishay, Manufacturer Part Number=CRCW060336K5FKEA, Max Operating Temperature=155°C, Max Power Dissipation=100mW, Min Operating Temperature=-55°C, Package Quantity=5000, Resistance=36.5kR, Resistance Tolerance=1%, Resistor Type="Thick Film", Supplier Part Number 1=541-36.5KHCT-ND, Temperature Coefficient=100ppm/°C, Voltage Rating=75V, Case/Package=0603, Category="Chip SMD Resistors", ComponentLink1Description=https://datasheet.ciiva.com/11810/0900766b80d98afc-11810172.pdf?src-supplier=RSComponents, ComponentLink1URL=https://datasheet.ciiva.com/11810/0900766b80d98afc-11810172.pdf?src-supplier=RSComponents, ComponentLink2Description=https://datasheet.ciiva.com/5545/dcrcwe3-109170-5545862.pdf?src-supplier=Mouser, ComponentLink2URL=https://datasheet.ciiva.com/5545/dcrcwe3-109170-5545862.pdf?src-supplier=Mouser, ComponentLink3Description=https://datasheet.ciiva.com/3257/dcrcwe3-3257495.pdf?src-supplier=Avnet, ComponentLink3URL=https://datasheet.ciiva.com/3257/dcrcwe3-3257495.pdf?src-supplier=Avnet, ComponentLink4Description=https://datasheet.ciiva.com/3257/dcrcwe3-3257496.pdf?src-supplier=Avnet, ComponentLink4URL=https://datasheet.ciiva.com/3257/dcrcwe3-3257496.pdf?src-supplier=Avnet, ComponentLink5Description=https://datasheet.ciiva.com/16765/70201119-16765097.pdf?src-supplier=Allied+Electronics, ComponentLink5URL=https://datasheet.ciiva.com/16765/70201119-16765097.pdf?src-supplier=Allied+Electronics, ComponentLink6Description=https://datasheet.ciiva.com/16893/dcrcwe3-16893273.pdf?src-supplier=Avnet+Europe, ComponentLink6URL=https://datasheet.ciiva.com/16893/dcrcwe3-16893273.pdf?src-supplier=Avnet+Europe, ComponentLink7Description=https://datasheet.ciiva.com/22705/1697337-22705850.pdf?src-supplier=Element14, ComponentLink7URL=https://datasheet.ciiva.com/22705/1697337-22705850.pdf?src-supplier=Element14, ComponentLink8Description=https://datasheet.ciiva.com/7671/1697337-7671643.pdf?src-supplier=Element14, ComponentLink8URL=https://datasheet.ciiva.com/7671/1697337-7671643.pdf?src-supplier=Element14, ComponentLink9Description=https://datasheet.ciiva.com/7792/125364-7792235.pdf?src-supplier=Element14, ComponentLink9URL=https://datasheet.ciiva.com/7792/125364-7792235.pdf?src-supplier=Element14, ComponentLink10Description=https://datasheet.ciiva.com/7671/1697337-7671644.pdf?src-supplier=Element14, ComponentLink10URL=https://datasheet.ciiva.com/7671/1697337-7671644.pdf?src-supplier=Element14, ComponentLink11Description=https://datasheet.ciiva.com/16395/dcrcwe3-16395406.pdf?src-supplier=Future+Electronics, ComponentLink11URL=https://datasheet.ciiva.com/16395/dcrcwe3-16395406.pdf?src-supplier=Future+Electronics, Construction=Rectangular, Contact Plating=Tin, Depth=0.85mm, Features="Automotive AEC-Q200", Height=0.45mm, Lead Free="Lead Free", Length=1.55mm, Military Standard=Not, Number of Pins=2, Number of Terminations=2, Packaging="Tape and Reel", Power Rating=100mW, Pricing 1="1=0,10000, 10=0,03800, 100=0,01560, 1000=0,00701, 2500=0,00608 (USD)", Radiation Hardening=No, REACH SVHC=Unknown, RoHS=Yes, RoHS Compliant=Yes, Series=CRCW, Size Code=0603, Supplier 1=Digi-Key, Technology="THICK FILM", Termination=SMD/SMT, Tolerance=1%, Voltage Rating (DC)=75V, Weight=7.1E-05oz, Width=0.85mm
R5: "Res Thick Film 0603 24.9K Ohm 1% 1/10W ±100ppm/°C Molded SMD SMD Paper T/R", Case Code (Metric)=1608, Case Code (Imperial)=0603, Manufacturer="Vishay Dale", Manufacturer Part Number=CRCW060324K9FKTA, Max Operating Temperature=155°C, Max Power Dissipation=100mW, Min Operating Temperature=-55°C, Package Quantity=5000, Resistance=24.9kR, Resistance Tolerance=1%, Resistor Type="Thick Film", Supplier Part Number 1=541-CRCW060324K9FKTACT-ND, Temperature Coefficient=100ppm/°C, Voltage Rating=75V, Case/Package=0603, Category="Chip SMD Resistors", ComponentLink1Description=https://datasheet.ciiva.com/16430/dcrcw-16430103.pdf?src-supplier=Future+Electronics, ComponentLink1URL=https://datasheet.ciiva.com/16430/dcrcw-16430103.pdf?src-supplier=Future+Electronics, ComponentLink2Description=https://datasheet.ciiva.com/2565/dcrcw-2565163.pdf?src-supplier=Digi-Key, ComponentLink2URL=https://datasheet.ciiva.com/2565/dcrcw-2565163.pdf?src-supplier=Digi-Key, ComponentLink3Description=https://datasheet.ciiva.com/9024/dcrcw-9024956.pdf?src-supplier=Avnet, ComponentLink3URL=https://datasheet.ciiva.com/9024/dcrcw-9024956.pdf?src-supplier=Avnet, Construction=Rectangular, Contact Plating=Tin,Lead, Depth=0.85mm, Features="Automotive AEC-Q200", Height=0.02inch, Lead Free="Contains Lead", Length=1.55mm, Military Standard=Not, Number of Pins=2, Number of Terminations=2, Packaging="Tape and Reel", Power Dissipation=100mW, Power Rating=100mW, Pricing 1="1=0,16000, 10=0,13900, 100=0,05350, 1000=0,02353, 2500=0,02032 (USD)", Radiation Hardening=No, REACH SVHC=Unknown, RoHS=No, RoHS Compliant=No, Series=CRCW, Size Code=0603, Stock 1=743, Supplier 1=Digi-Key, Tolerance=1%, Voltage Rating (DC)=75V, Weight=7.1E-05oz, Width=0.85mm
R7: "CRCW Thick Film Commodity Chip Resistor 0603 Size 22.6K Ohm 1% 0.1 W 100 ppm/K 2-Pin SMD Paper T/R", Manufacturer=Vishay, Manufacturer Part Number=CRCW060322K6FKEBC, Resistance=22.6kR, Supplier Part Number 1=CRCW060322K6FKEBC-ND, Category="Chip SMD Resistors", Pricing 1="60000=0,00313, 100000=0,00307 (USD)", RoHS=Yes, RoHS Compliant=Yes, Supplier 1=Digi-Key
R10 R17: "Res SMD 15.4K Ohm 1% 1/10W 0603", Case Code (Metric)=1608, Case Code (Imperial)=0603, Manufacturer="Vishay Dale", Manufacturer Part Number=CRCW060315K4FKEB, Max Operating Temperature=155°C, Max Power Dissipation=100mW, Min Operating Temperature=-55°C, Package Quantity=10000, Resistance=15.4kR, Resistor Type="Thick Film", Supplier Part Number 1=541-CRCW060315K4FKEBCT-ND, Temperature Coefficient=100ppm/°C, Tolerance=1%, Voltage Rating=75V, Case/Package=0603, Category="Chip SMD Resistors", ComponentLink1Description=https://datasheet.ciiva.com/5544/dcrcwe3-109170-5544853.pdf?src-supplier=Mouser, ComponentLink1URL=https://datasheet.ciiva.com/5544/dcrcwe3-109170-5544853.pdf?src-supplier=Mouser, Features="Automotive AEC-Q200", Height=0.02inch, Lead Free="Lead Free", Length=0.061inch, Number of Terminations=2, Packaging="Tape and Reel", Power Rating=100mW, Pricing 1="1=0,10000, 10=0,03800, 100=0,01560, 1000=0,00701, 2500=0,00608, 5000=0,00503 (USD)", RoHS=Yes, RoHS Compliant=Yes, Series=CRCW, Stock 1=6, Supplier 1=Digi-Key, Termination=SMD/SMT, Weight=7.1E-05oz, Width=0.033inch
R12: "Res Thick Film 0603 84.5K Ohm 1% 1/10W ±100ppm/°C Molded SMD SMD Paper T/R", Case Code (Metric)=1608, Case Code (Imperial)=0603, Manufacturer=Vishay, Manufacturer Part Number=CRCW060384K5FKEA, Max Operating Temperature=155°C, Max Power Dissipation=100mW, Min Operating Temperature=-55°C, Package Quantity=10, Resistance=84.5kR, Resistance Tolerance=1%, Resistor Type="Thick Film", Supplier Part Number 1=541-84.5KHCT-ND, Temperature Coefficient=100ppm/°C, Voltage Rating=75V, Case/Package=0603, Category="Chip SMD Resistors", ComponentLink1Description=https://datasheet.ciiva.com/8986/dcrcwe3-8986391.pdf?src-supplier=Avnet, ComponentLink1URL=https://datasheet.ciiva.com/8986/dcrcwe3-8986391.pdf?src-supplier=Avnet, ComponentLink2Description=https://datasheet.ciiva.com/22871/70201119-22871818.pdf?src-supplier=Allied+Electronics, ComponentLink2URL=https://datasheet.ciiva.com/22871/70201119-22871818.pdf?src-supplier=Allied+Electronics, ComponentLink3Description=https://datasheet.ciiva.com/2513/dcrcwe3-2513644.pdf?src-supplier=Digi-Key, ComponentLink3URL=https://datasheet.ciiva.com/2513/dcrcwe3-2513644.pdf?src-supplier=Digi-Key, ComponentLink4Description=https://datasheet.ciiva.com/2513/dcrcwe3-2513645.pdf?src-supplier=Digi-Key, ComponentLink4URL=https://datasheet.ciiva.com/2513/dcrcwe3-2513645.pdf?src-supplier=Digi-Key, ComponentLink5Description=https://datasheet.ciiva.com/16204/dcrcw-16204237.pdf?src-supplier=Future+Electronics, ComponentLink5URL=https://datasheet.ciiva.com/16204/dcrcw-16204237.pdf?src-supplier=Future+Electronics, ComponentLink6Description=https://datasheet.ciiva.com/2513/dcrcwe3-2513646.pdf?src-supplier=Digi-Key, ComponentLink6URL=https://datasheet.ciiva.com/2513/dcrcwe3-2513646.pdf?src-supplier=Digi-Key, ComponentLink7Description=https://datasheet.ciiva.com/7816/1697337-7816078.pdf?src-supplier=Element14, ComponentLink7URL=https://datasheet.ciiva.com/7816/1697337-7816078.pdf?src-supplier=Element14, ComponentLink8Description=https://datasheet.ciiva.com/7816/1697337-7816079.pdf?src-supplier=Element14, ComponentLink8URL=https://datasheet.ciiva.com/7816/1697337-7816079.pdf?src-supplier=Element14, Construction=Rectangular, Contact Plating=Tin, Depth=0.85mm, Features="Automotive AEC-Q200", Height=0.02inch, Lead Free="Lead Free", Length=1.55mm, Military Standard=Not, Number of Pins=2, Number of Terminations=2, Packaging="Tape and Reel", Power Rating=100mW, Pricing 1="1=0,10000, 10=0,03800, 100=0,01560, 1000=0,00701, 2500=0,00608 (USD)", Radiation Hardening=No, REACH SVHC=Unknown, RoHS=Yes, RoHS Compliant=Yes, Series=CRCW, Stock 1=4, Supplier 1=Digi-Key, Termination=SMD/SMT, Tolerance=1%, Voltage Rating (DC)=75V, Weight=7.1E-05oz, Width=0.85mm
R13: "Res Thick Film 0603 10K Ohm 1% 0.1W(1/10W) ±100ppm/C Pad SMD Automotive T/R", Case/Package=0603, Manufacturer="Vishay Dale", Manufacturer Part Number=CRCW060310K0FKEE, Max Operating Temperature=155°C, Max Power Dissipation=100mW, Min Operating Temperature=-55°C, Package Quantity=50000, Resistance=10kR, Resistor Type="Thick Film", Supplier Part Number 1=CRCW060310K0FKEE-ND, Temperature Coefficient=100ppm/°C, Tolerance=1%, Category="Chip SMD Resistors", ComponentLink1Description=http://www.vishay.com/docs/20035/dcrcwe3.pdf?src-supplier=Digi-Key, ComponentLink1URL=http://www.vishay.com/docs/20035/dcrcwe3.pdf?src-supplier=Digi-Key, Features="Automotive AEC-Q200", Height=0.02inch, Lead Free="Lead Free", Length=0.061inch, Number of Terminations=2, Packaging="Tape and Reel", Pricing 1="50000=0,00352 (USD)", RoHS=Yes, RoHS Compliant=Yes, Supplier 1=Digi-Key, Width=0.033inch
R14: "Res Thick Film 0603 20K Ohm 1% 1/10W ±100ppm/°C Molded SMD SMD Paper T/R", Case Code (Metric)=1608, Case Code (Imperial)=0603, Manufacturer="Vishay Dale", Manufacturer Part Number=CRCW060320K0FKEB, Max Operating Temperature=155°C, Max Power Dissipation=100mW, Min Operating Temperature=-55°C, Package Quantity=10000, Resistance=20kR, Resistance Tolerance=1%, Resistor Type="Thick Film", Supplier Part Number 1=541-CRCW060320K0FKEBDKR-ND, Temperature Coefficient=100ppm/°C, Voltage Rating=75V, Case/Package=0603, Category="Chip SMD Resistors", ComponentLink1Description=http://components.arrow.com/part/dataview/41401338S39653N6892?src-supplier=Arrow+Electronics, ComponentLink1URL=http://components.arrow.com/part/dataview/41401338S39653N6892?src-supplier=Arrow+Electronics, ComponentLink2Description=http://www.mouser.com/ds/2/427/dcrcwe3-109170.pdf?src-supplier=Mouser, ComponentLink2URL=http://www.mouser.com/ds/2/427/dcrcwe3-109170.pdf?src-supplier=Mouser, ComponentLink3Description=http://www.farnell.com/datasheets/2111203.pdf?src-supplier=Farnell, ComponentLink3URL=http://www.farnell.com/datasheets/2111203.pdf?src-supplier=Farnell, ComponentLink4Description=http://components.arrow.com/part/dataview/0323_06078073?src-supplier=Arrow+Europe, ComponentLink4URL=http://components.arrow.com/part/dataview/0323_06078073?src-supplier=Arrow+Europe, ComponentLink5Description=http://www.farnell.com/datasheets/2111203.pdf?src-supplier=Newark, ComponentLink5URL=http://www.farnell.com/datasheets/2111203.pdf?src-supplier=Newark, ComponentLink6Description=http://www.vishay.com/docs/20035/dcrcwe3.pdf?src-supplier=Avnet, ComponentLink6URL=http://www.vishay.com/docs/20035/dcrcwe3.pdf?src-supplier=Avnet, ComponentLink7Description=http://www.farnell.com/datasheets/2111203.pdf?src-supplier=Element14, ComponentLink7URL=http://www.farnell.com/datasheets/2111203.pdf?src-supplier=Element14, ComponentLink8Description=http://www.vishay.com/docs/20035/dcrcwe3.pdf?src-supplier=Digi-Key, ComponentLink8URL=http://www.vishay.com/docs/20035/dcrcwe3.pdf?src-supplier=Digi-Key, Construction=Rectangular, Contact Plating=Tin, Depth=0.85mm, Features="Automotive AEC-Q200", Height=0.02inch, Lead Free="Lead Free", Length=1.55mm, Military Standard=Not, Number of Pins=2, Number of Terminations=2, Packaging="Tape and Reel", Power Rating=100mW, Pricing 1="1=0,10000, 10=0,03800, 100=0,01560, 1000=0,00701, 2500=0,00608, 5000=0,00503 (USD)", Radiation Hardening=No, REACH SVHC=Unknown, RoHS=Yes, RoHS Compliant=Yes, Series=CRCW, Supplier 1=Digi-Key, Tolerance=1%, Voltage Rating (DC)=75V, Weight=7.1E-05oz, Width=0.85mm
R18 R19 R20: "Res Thick Film 0603 100K Ohm 5% 1/10W ±200ppm/°C Molded SMD SMD Paper T/R", Case Code (Metric)=1608, Case Code (Imperial)=0603, Manufacturer="Vishay Dale", Manufacturer Part Number=CRCW0603100KJNEB, Max Operating Temperature=155°C, Max Power Dissipation=100mW, Min Operating Temperature=-55°C, Package Quantity=10000, Resistance=100kR, Resistor Type="Thick Film", Supplier Part Number 1=541-CRCW0603100KJNEBCT-ND, Temperature Coefficient=200ppm/°C, Tolerance=5%, Voltage Rating=75V, Case/Package=0603, Category="Chip SMD Resistors", ComponentLink1Description=https://datasheet.ciiva.com/5543/dcrcwe3-109170-5543336.pdf?src-supplier=Mouser, ComponentLink1URL=https://datasheet.ciiva.com/5543/dcrcwe3-109170-5543336.pdf?src-supplier=Mouser, ComponentLink2Description=https://datasheet.ciiva.com/3256/dcrcwe3-3256922.pdf?src-supplier=Avnet, ComponentLink2URL=https://datasheet.ciiva.com/3256/dcrcwe3-3256922.pdf?src-supplier=Avnet, ComponentLink3Description=https://datasheet.ciiva.com/3256/dcrcwe3-3256923.pdf?src-supplier=Avnet, ComponentLink3URL=https://datasheet.ciiva.com/3256/dcrcwe3-3256923.pdf?src-supplier=Avnet, Construction=Rectangular, Contact Plating=Tin, Depth=0.85mm, Features="Automotive AEC-Q200", Height=0.02inch, Lead Free="Lead Free", Length=1.55mm, Military Standard=Not, Number of Terminations=2, Packaging="Tape and Reel", Power Rating=100mW, Pricing 1="1=0,10000, 10=0,03300, 100=0,01360, 1000=0,00610, 2500=0,00529, 5000=0,00437 (USD)", Radiation Hardening=No, RoHS=Yes, RoHS Compliant=Yes, Series=CRCW, Stock 1=592, Supplier 1=Digi-Key, Termination=SMD/SMT, Weight=7.1E-05oz, Width=0.033inch
R22 R23 R24: "Res Thick Film 0603 33K Ohm 5% 1/10W ±200ppm/°C Molded SMD SMD Paper T/R", Case Code (Metric)=1608, Case Code (Imperial)=0603, Manufacturer="Vishay Dale", Manufacturer Part Number=CRCW060333K0JNEA, Max Operating Temperature=155°C, Max Power Dissipation=100mW, Min Operating Temperature=-55°C, Package Quantity=1, Resistance=33kR, Resistance Tolerance=5%, Resistor Type="Thick Film", Supplier Part Number 1=541-33KGCT-ND, Temperature Coefficient=200ppm/°C, Voltage Rating=75V, Case/Package=0603, Category="Chip SMD Resistors", ComponentLink1Description=https://datasheet.ciiva.com/2462/dcrcwe3-2462529.pdf?src-supplier=Digi-Key, ComponentLink1URL=https://datasheet.ciiva.com/2462/dcrcwe3-2462529.pdf?src-supplier=Digi-Key, ComponentLink2Description=https://datasheet.ciiva.com/2462/dcrcwe3-2462530.pdf?src-supplier=Digi-Key, ComponentLink2URL=https://datasheet.ciiva.com/2462/dcrcwe3-2462530.pdf?src-supplier=Digi-Key, ComponentLink3Description=https://datasheet.ciiva.com/2462/dcrcwe3-2462531.pdf?src-supplier=Digi-Key, ComponentLink3URL=https://datasheet.ciiva.com/2462/dcrcwe3-2462531.pdf?src-supplier=Digi-Key, ComponentLink4Description=https://datasheet.ciiva.com/16778/70201119-16778952.pdf?src-supplier=Allied+Electronics, ComponentLink4URL=https://datasheet.ciiva.com/16778/70201119-16778952.pdf?src-supplier=Allied+Electronics, ComponentLink5Description=https://datasheet.ciiva.com/5551/dcrcwe3-109170-5551035.pdf?src-supplier=Mouser, ComponentLink5URL=https://datasheet.ciiva.com/5551/dcrcwe3-109170-5551035.pdf?src-supplier=Mouser, ComponentLink6Description=https://datasheet.ciiva.com/16389/dcrcwe3-16389979.pdf?src-supplier=Future+Electronics, ComponentLink6URL=https://datasheet.ciiva.com/16389/dcrcwe3-16389979.pdf?src-supplier=Future+Electronics, ComponentLink7Description=https://datasheet.ciiva.com/3257/dcrcwe3-3257469.pdf?src-supplier=Avnet, ComponentLink7URL=https://datasheet.ciiva.com/3257/dcrcwe3-3257469.pdf?src-supplier=Avnet, ComponentLink8Description=https://datasheet.ciiva.com/3257/dcrcwe3-3257470.pdf?src-supplier=Avnet, ComponentLink8URL=https://datasheet.ciiva.com/3257/dcrcwe3-3257470.pdf?src-supplier=Avnet, Construction=Rectangular, Contact Plating=Tin, Depth=0.85mm, Features="Automotive AEC-Q200", Height=0.45mm, Lead Free="Lead Free", Length=1.55mm, Military Standard=Not, Mount="Surface Mount", Number of Pins=2, Number of Terminations=2, Packaging="Tape and Reel", Power Rating=100mW, Pricing 1="1=0,10000, 10=0,03300, 100=0,01360, 1000=0,00610, 2500=0,00529 (USD)", Radiation Hardening=No, REACH SVHC=Unknown, RoHS=Yes, RoHS Compliant=Yes, Series=CRCW, Size Code=0603, Stock 1=6675, Supplier 1=Digi-Key, Technology="THICK FILM", Termination=SMD/SMT, Tolerance=5%, Voltage Rating (DC)=75V, Weight=7.1E-05oz, Width=0.033inch
U1: "4.5- to 17-V Input Voltage, 5-A/3-A/2-A Output Current Triple Buck Converter 32-VQFN -40 to 85", Case/Package=VQFN, Manufacturer="Texas Instruments", Manufacturer Part Number=TPS65265RHBR, Max Operating Temperature=85°C, Max Output Voltage=17V, Min Operating Temperature=-40°C, Min Output Voltage=600mV, Min Input Voltage=4.5V, Output Current=2A, Supplier Part Number 1=296-TPS65265RHBRDKR-ND, Switching Frequency=2.3MHz, Category="Voltage Regulators - Switching", ComponentLink1Description=http://www.ti.com/lit/gpn/tps65265?src-supplier=Mouser, ComponentLink1URL=http://www.ti.com/lit/gpn/tps65265?src-supplier=Mouser, ComponentLink2Description=http://www.ti.com/lit/ds/symlink/tps65265.pdf?src-supplier=Digi-Key, ComponentLink2URL=http://www.ti.com/lit/ds/symlink/tps65265.pdf?src-supplier=Digi-Key, Lead Free="Lead Free", Max Input Voltage=17V, Mount="Surface Mount", Number of Outputs=3, Output Configuration=Positive, Output Type=Adjustable, Packaging="Tape and Reel", Pricing 1="1=3,40000, 10=3,05300, 25=2,88600, 100=2,50110, 250=2,37280, 500=2,12912, 1000=2,11750 (USD)", RoHS=Yes, RoHS Compliant=Yes, Supplier 1=Digi-Key, Synchronous Rectifier=Yes

## Via types
v1: diameter 0.6, hole 0.3, Top Layer to Bottom Layer, 74 vias

## Nets (pads, with @x,y where several pads share a name; then routed paths per layer and width w, separated by ;. In a path a pad name is that pad's centre, name@x,y a point inside that pad or via, vN(x,y) a via of type N, cw(c..) or ccw(c..) an arc to the next point about the centre after c; other vN are vias at no path point)
1V8: C26.2 C27.2 C28.2 J4.2 L3.2 R16.2 | length 42.6
  Top Layer w1: 115.267,78.47 115.558,78.178 116.152,78.178 117.462,76.869 121.667,76.869 123.268,75.268 123.268,69.768 122.5,69
  Top Layer w1.75: L3.2 108.6,61 C27.2 116.218,61.043 116.218,63.957 C28.2 116.218,64.043 116.218,66.957 C26.2 116.175,67.982 117.593,69.4 122.594,69.4 ; 122.347,69.153 J4.2@125.448,66.052
3V3: C16.2 C17.2 C18.2 J3.2 L2.2 R9.2 | length 37.2
  Top Layer w1.75: R9.2 82.9,85.4 78,80.5 J3.2 81.402,76.598 83.302,76.598 84.7,75.2 L2.2 84.7,67.45 86.325,65.825 C16.2 C17.2 C18.2
5V: C8.2 C9.2 C10.2 C11.2 J2.2 L1.2 R4.2 | length 48.4
  Top Layer w1: R4.2 116.131,81 117.531,79.6 120.919,79.6 122.163,80.844 122.163,83.995 121.158,85 118.5,85 C8.2@116.675,86.825
  Top Layer w2: L1.2 116.002,96.8 116.675,96.127 C11.2 ; C8.2@116.675,86.825 C8.2 C9.2 C10.2 C11.2 ; J2.2 121.911,98.8 117.847,98.8 116.675,97.628 C11.2
+12: C3.2 C4.2 C5.2 C6.2 J1.1 R18.2 R19.2 R20.2 U1.12 U1.13 U1.30 U1.31
  other v1: 97.1,75.1 97.9,75.1 98.7,75.1 100,75.1 100.8,75.1 97,83.9 97.9,83.9 98.8,83.9 99.6,84.4 100.5,84.4 85.445,88 85.445,89 87.3,93.6 87.3,94.495 87.3,99.6 87.3,100.6
BST1: R1.2 U1.25 | length 20.9
  Top Layer w0.203: U1.25 103.669,82.375 103.894,82.6 103.894,83.874 105.214,85.195 111.68,85.195 112.43,84.445 112.43,82.964 113.18,82.214 116.889,82.214 118.075,83.4 R1.2
BST2: R8.2 U1.9 | length 16.3
  Top Layer w0.203: R8.2@85.625,83.4 86.7,82.325 86.7,80.2 89.056,77.844 96.712,77.844 96.93,77.625 U1.9
BST3: R15.2 U1.16 | length 18.3
  Top Layer w0.203: U1.16 101.75,76.669 105.012,73.407 117.607,73.407 117.7,73.5 ; R15.2@118.175,73.5 R15.2
COMP1: C12.1 R5.1 U1.23 | length 5.1
  Top Layer w0.203: U1.23 103.145,81.25 103.156,81.261 105.139,81.261 C12.1 ; C12.1@105.4,81.4 R5.1
COMP2: C19.1 R10.1 U1.7 | length 10.2
  Top Layer w0.203: C19.1 89.425,83.4 90.425,82.4 92.075,82.4 R10.1@93.075,81.4 ; R10.1 R10.1@93.075,81.4 ; U1.7 95.725,78.75 93.498,80.977 93.498,81.027 93.125,81.4 R10.1@93.075,81.4
COMP3: C29.1 R17.1 U1.18 | length 9.8
  Top Layer w0.203: U1.18 102.384,78.741 102.667,78.741 103.834,77.574 103.834,76.541 105.375,75 105.425,75 106.205,74.22 108.595,74.22 109.375,75 R17.1
EN1: J5.2 U1.3 | length 30.5
  Top Layer w0.203: J5.2 78.74,95.85 79.99,94.6 83,94.6 83.7,95.3 87.9,95.3 88.506,94.694 88.506,92.894 90.6,90.8 93.3,90.8 95.294,88.806 95.294,82.806 97.02,81.08 97.02,81.072 97.333,80.759 97.616,80.759 U1.3
EN2: J6.2 U1.4 | length 28.7
  Top Layer w0.203: J6.2 78.74,92.35 79.99,93.6 82.9,93.6 83.62,92.88 87.42,92.88 90.4,89.9 93.4,89.9 94.887,88.413 94.887,82.383 97.02,80.25 U1.4
EN3: J7.2 U1.5 | length 27.5
  Top Layer w0.203: J7.2 78.74,87.85 79.73,86.86 79.79,86.8 81.18,86.8 ccw(c81.28,87.85) 81.38,86.8 88.4,86.8 90.6,89 93.2,89 94.481,87.719 94.481,82.215 96.945,79.75 U1.5
FB1: R2.2 R3.1 U1.22 | length 8.7
  Top Layer w0.203: U1.22 103.22,80.75 103.324,80.855 103.826,80.855 105.002,79.679 105.002,79.373 105.375,79 R3.1 105.425,79 106.205,78.22 107.626,78.22 108.406,79 R2.2
FB2: R6.2 R7.1 U1.6 | length 8.8